# Altium PCB 20180623.PcbDoc (part 2 of 2)
Units mil, origin at the board's own origin, x right, y up, seen from the top; angles counter-clockwise.
Board outline 4375.58 x 1725.58 mil, 2 copper layers (Top Layer, Bottom Layer); 68 components, 90 nets, 323 pads, 77 vias.
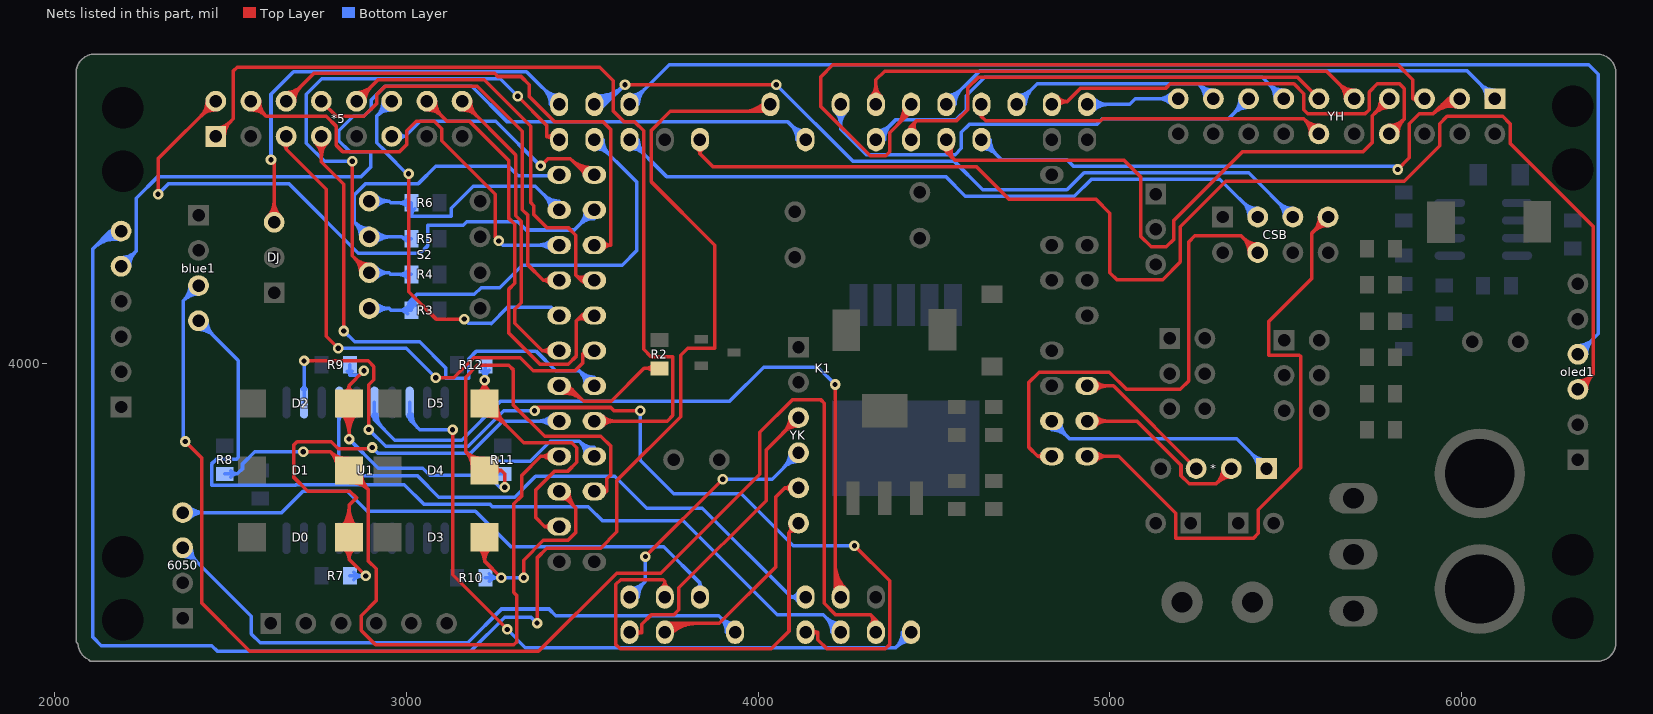
[diagram p2: the nets of this part, all layers, seen from the top]

## Via types
v1: diameter 30, hole 15, Top Layer to Bottom Layer, 77 vias

## Nets (pads, with @x,y where several pads share a name; then routed paths per layer and width w, separated by ;. In a path a pad name is that pad's centre, name@x,y a point inside that pad or via, vN(x,y) a via of type N, cw(c..) or ccw(c..) an arc to the next point about the centre after c; other vN are vias at no path point) (continued)
PTA25: K1.81 YH.10 | length 565.4
  Bottom Layer w10: K1.81@4935,4735 5056,4735 5072,4751 YH.10@5194,4751 ; K1.81@4945.61,4724.39 cw(c4971.21,4698.79) 4971.21,4735 cw(c4971.21,4771.21) K1.81@4945.61,4745.61 ; K1.81@4952.68,4717.32 cw(c4995.36,4674.64) 4995.36,4735 cw(c4995.36,4795.36) K1.81@4952.68,4752.68 ; YH.10@5176.66,4733.66 ccw(c5134.79,4691.79) 5134.79,4751 ccw(c5134.79,4810.21) YH.10@5176.66,4768.34 ; YH.10@5183.73,4740.73 ccw(c5158.93,4715.93) 5158.93,4751 ccw(c5158.93,4786.07) YH.10@5183.73,4761.27
PTA26: K1.85 YH.9 | length 900.7
  Bottom Layer w10: K1.85@4735,4735 4793.53,4793.53 5251.47,4793.53 YH.9@5294,4751 ; K1.85@4735,4750 ccw(c4735,4786.21) 4760.61,4760.61 ccw(c4786.21,4735) K1.85@4750,4735 ; K1.85@4735,4760 ccw(c4735,4820.36) 4777.68,4777.68 ccw(c4820.36,4735) K1.85@4760,4735 ; YH.9@5269.47,4751 ccw(c5210.26,4751) 5252.13,4792.87 ccw(c5294,4834.74) YH.9@5294,4775.53 ; YH.9@5279.47,4751 ccw(c5244.4,4751) 5269.2,4775.8 ccw(c5294,4800.6) YH.9@5294,4765.53
PTA27: K1.83 YH.17 | length 1521.5
  Top Layer w10: K1.83@4835,4735 4835,4743 4879,4743 ; K1.83@4850.75,4756.14 ccw(c4879,4779.94) 4879,4743 ; K1.83@4850.87,4729.76 cw(c4879,4706.51) 4879,4743 ; YH.17@5794,4651 5836.53,4693.53 5836.53,4780 5823,4793.53 5760,4793.53 5736.53,4770.06 5736.53,4720 5725,4708.47 5562.53,4708.47 5551,4720 5551,4765.53 5523,4793.53 5171.53,4793.53 5159.47,4781.47 4917.47,4781.47 4879,4743 ; YH.17@5794,4665.53 ccw(c5794,4700.6) 5818.8,4675.8 ccw(c5843.6,4651) YH.17@5808.53,4651 ; YH.17@5794,4675.53 ccw(c5794,4734.74) 5835.87,4692.87 ccw(c5877.74,4651) YH.17@5818.53,4651
PTA29: K1.87 YH.15 | length 1187
  Top Layer w10: K1.87@4629.46,4707.29 cw(c4627.43,4700) 4635,4700 ; K1.87@4635,4735 4635,4700 ; K1.87@4640.54,4707.29 ccw(c4642.57,4700) 4635,4700 ; YH.15@5569.47,4651 ccw(c5510.26,4651) 5552.13,4692.87 ccw(c5594,4734.74) YH.15@5594,4675.53 ; YH.15@5579.47,4651 ccw(c5544.4,4651) 5569.2,4675.8 ccw(c5594,4700.6) YH.15@5594,4665.53 ; YH.15@5594,4651 5551,4694 4980,4694 4974,4688 4647,4688 4635,4700
PTB0: K1.89 YH.1 | length 1930.9
  Bottom Layer w10: K1.89@4535,4735 4630,4830 6015,4830 YH.1@6094,4751 ; K1.89@4535,4750 ccw(c4535,4786.21) 4560.61,4760.61 ccw(c4586.21,4735) K1.89@4550,4735 ; K1.89@4535,4760 ccw(c4535,4820.36) 4577.68,4777.68 ccw(c4620.36,4735) K1.89@4560,4735 ; YH.1@6069.47,4751 ccw(c6010.26,4751) 6052.13,4792.87 ccw(c6094,4834.74) YH.1@6094,4775.53 ; YH.1@6079.47,4751 ccw(c6044.4,4751) 6069.2,4775.8 ccw(c6094,4800.6) YH.1@6094,4765.53
PTB1: K1.88 YH.2 | length 1950
  Top Layer w10: v1(5818,4550) 5851,4583 5851,4680 5879,4708 5918,4708 ; 5930.43,4720.43 cw(c5974.92,4675.95) YH.2@5990.42,4736.92 ; 5942.86,4732.86 cw(c5979.96,4695.77) YH.2@5992.88,4746.61 ; 5955.3,4745.3 cw(c5985,4715.59) YH.2@5995.35,4756.3 ; YH.2@5970.51,4743.93 ccw(c5961,4741.07) 5961,4751 ; YH.2@5970.51,4758.07 cw(c5961,4760.93) 5961,4751 ; YH.2@5987.96,4727.23 ccw(c5969.88,4656.12) 5918,4708 ; YH.2@5994,4751 5961,4751 ; 5918,4708 5961,4751
  Bottom Layer w10: K1.88@4635,4610 cw(c4635,4549.64) 4677.68,4592.32 cw(c4720.36,4635) K1.88@4660,4635 ; K1.88@4635,4620 cw(c4635,4583.79) 4660.61,4609.39 cw(c4686.21,4635) K1.88@4650,4635 ; K1.88@4635,4635 4692,4578 4878,4578 4897.47,4558.53 5809.47,4558.53 v1(5818,4550)
PTB2: K1.91 YH.3 | length 2451.7
  Top Layer w10: 4391.28,4671.28 ccw(c4335.42,4727.13) K1.91@4414.41,4727.13 ; 4408.35,4688.35 ccw(c4369.57,4727.13) K1.91@4424.41,4727.13 ; 4420.55,4700.55 cw(c4435,4686.1) K1.91@4435,4706.54 ; K1.91@4435,4735 4435,4715 4374,4654 4374,4600 4362.53,4588.53 4318.47,4588.53 4178,4729 4178,4813 4212.53,4847.53 5818.53,4847.53 5861,4805.06 5861,4751 ; YH.3@5870.51,4743.93 ccw(c5861,4741.07) 5861,4751 ; YH.3@5870.51,4758.07 cw(c5861,4760.93) 5861,4751 ; YH.3@5894,4751 5861,4751
PTB3: K1.90 YH.4 | length 2042.1
  Top Layer w10: K1.90@4529.46,4607.29 cw(c4527.43,4600) 4535,4600 ; K1.90@4535,4635 4535,4600 ; K1.90@4535.52,4626.84 ccw(c4559.15,4613.93) 4540.11,4594.89 ; K1.90@4540.54,4607.29 ccw(c4542.57,4600) 4535,4600 ; K1.90@4544.29,4622.05 ccw(c4571.37,4607.26) 4549.55,4585.45 ; K1.90@4553.07,4617.26 ccw(c4583.58,4600.59) 4559,4576 ; YH.4@5769.47,4751 cw(c5710.26,4751) 5752.13,4709.13 cw(c5794,4667.26) YH.4@5794,4726.47 ; YH.4@5779.47,4751 cw(c5744.4,4751) 5769.2,4726.2 cw(c5794,4701.4) YH.4@5794,4736.47 ; YH.4@5794,4751 5745.67,4702.67 5745.67,4626.67 5720,4601 5377,4601 5181,4405 5181,4351 5160,4330 5117,4330 5087,4360 5087,4529 5040,4576 4559,4576 ; 4535,4600 4559,4576
PTB4: K1.93 YH.5 | length 1697.6
  Top Layer w10: K1.93@4320.44,4757.43 ccw(c4285.29,4792.58) 4335,4792.58 ccw(c4384.71,4792.58) K1.93@4349.56,4757.43 ; K1.93@4335,4735 4335,4804.53 4360,4829.53 5615.47,4829.53 YH.5@5694,4751 ; YH.5@5669.47,4751 ccw(c5610.26,4751) 5652.13,4792.87 ccw(c5694,4834.74) YH.5@5694,4775.53 ; YH.5@5679.47,4751 ccw(c5644.4,4751) 5669.2,4775.8 ccw(c5694,4800.6) YH.5@5694,4765.53
PTB5: K1.92 YH.6 | length 1445.6
  Top Layer w10: K1.92@4427.52,4662.06 ccw(c4423.26,4673) 4435,4673 ; K1.92@4435,4635 4435,4673 ; K1.92@4435.42,4643.29 cw(c4450.94,4658.35) 4435.65,4673.65 ; K1.92@4442.48,4662.06 cw(c4446.74,4673) 4435,4673 ; K1.92@4442.6,4650.25 cw(c4458.22,4665.42) 4442.82,4680.82 ; K1.92@4449.77,4657.22 cw(c4465.51,4672.49) 4450,4688 ; YH.6@5594,4751 5533.47,4811.53 4625.53,4811.53 4596,4782 4596,4720 4564,4688 4450,4688 ; 4435,4673 4450,4688
PTB6: K1.94 YH.7 | length 1580.8
  Bottom Layer w10: K1.94@4335,4635 4392,4692 4564,4692 4592,4720 4592,4760 4644,4812 5433,4812 YH.7@5494,4751 ; K1.94@4335,4650 ccw(c4335,4686.21) 4360.61,4660.61 ccw(c4386.21,4635) K1.94@4350,4635 ; K1.94@4335,4660 ccw(c4335,4720.36) 4377.68,4677.68 ccw(c4420.36,4635) K1.94@4360,4635 ; YH.7@5469.47,4751 ccw(c5410.26,4751) 5452.13,4792.87 ccw(c5494,4834.74) YH.7@5494,4775.53 ; YH.7@5479.47,4751 ccw(c5444.4,4751) 5469.2,4775.8 ccw(c5494,4800.6) YH.7@5494,4765.53
PTB7: K1.95 YH.8 | length 1651.8
  Bottom Layer w10: K1.95@4217.32,4717.32 cw(c4174.64,4674.64) 4235,4674.64 cw(c4295.36,4674.64) K1.95@4252.68,4717.32 ; K1.95@4224.39,4724.39 cw(c4198.79,4698.79) 4235,4698.79 cw(c4271.21,4698.79) K1.95@4245.61,4724.39 ; K1.95@4235,4735 4235,4665 4308,4592 4560,4592 4578,4610 4578,4656 4600,4678 4962,4678 4978,4694 5337,4694 YH.8@5394,4751 ; YH.8@5369.47,4751 cw(c5310.26,4751) 5352.13,4709.13 cw(c5394,4667.26) YH.8@5394,4726.47 ; YH.8@5379.47,4751 cw(c5344.4,4751) 5369.2,4726.2 cw(c5394,4701.4) YH.8@5394,4736.47
PTB10_RX2: ?.6 K1.99 | length 5155.1
  Top Layer w10: v1(3372,3261) 3372,3446 3400,3474 3553,3474 3599,3520 3599,3666 3780,3847 3780,4022 3800,4042 3877,4042 3877,4335 3696,4516 3696,4660 3751,4715 4035,4715 K1.99@4035,4735 ; 3956.02,4715 ccw(c3956.02,4806.11) K1.99@4020.44,4741.69 ; 3980.16,4715 ccw(c3980.16,4781.97) K1.99@4027.51,4734.61 ; 4004.3,4715 ccw(c4004.3,4757.83) K1.99@4034.58,4727.54
  Bottom Layer w10: 2124.21,4339.21 cw(c2177.61,4285.82) ?.6@2188,4360.61 ; 2138.42,4353.42 cw(c2181.07,4310.77) ?.6@2189.38,4370.52 ; 2152.63,4367.63 cw(c2184.54,4335.72) ?.6@2190.75,4380.42 ; ?.6@2165.96,4370.13 ccw(c2160,4368.92) 2160,4375 ; ?.6@2165.96,4379.87 cw(c2160,4381.08) 2160,4375 ; ?.6@2186.62,4350.71 ccw(c2174.14,4260.86) 2110,4325 ; ?.6@2190,4375 2160,4375 ; v1(3372,3261) 3355,3278 3280,3278 3183.47,3181.47 2463.53,3181.47 2448,3197 2134,3197 2110,3221 2110,4325 ; 2110,4325 2160,4375
PTB11_TX2: ?.5 K1.98 | length 2845.9
  Bottom Layer w10: ?.5@2190,4275 2233,4318 2233,4468 2295,4530 2872.46,4530 2900,4557.54 2900,4599.54 2898.54,4601 2840,4601 2809,4632 2809,4660 2850,4701 2880,4701 2901.53,4722.53 2901.53,4748.53 2940,4787 3186,4787 3288,4685 4085,4685 K1.98@4135,4635 ; ?.5@2190,4289.53 ccw(c2190,4324.6) 2214.8,4299.8 ccw(c2239.6,4275) ?.5@2204.53,4275 ; ?.5@2190,4299.53 ccw(c2190,4358.74) 2231.87,4316.87 ccw(c2273.74,4275) ?.5@2214.53,4275 ; K1.98@4110,4635 ccw(c4049.64,4635) 4092.32,4677.68 ccw(c4135,4720.36) K1.98@4135,4660 ; K1.98@4120,4635 ccw(c4083.79,4635) 4109.39,4660.61 ccw(c4135,4686.21) K1.98@4135,4650
PTB21: K1.104 oled1.3 | length 3937.9
  Top Layer w10: K1.104@3826.4,4608.42 cw(c3820.24,4595) 3835,4595 ; K1.104@3835,4635 3835,4595 ; K1.104@3843.6,4608.42 ccw(c3849.76,4595) 3835,4595 ; oled1.3@6330,3925 6373,3968 6373,4389 6137,4625 6137,4680 6116,4701 5958,4701 5937,4680 5937,4617 5836.18,4516.18 5329.31,4516.18 5200.13,4387 5200.13,4287.13 5150,4237 5020,4237 5000,4257 5000,4426 4960,4466 4713,4466 4621,4558 3872,4558 3835,4595 ; oled1.3@6330,3939.53 ccw(c6330,3974.6) 6354.8,3949.8 ccw(c6379.6,3925) oled1.3@6344.53,3925 ; oled1.3@6330,3949.53 ccw(c6330,4008.74) 6371.87,3966.87 ccw(c6413.74,3925) oled1.3@6354.53,3925
PTB22: K1.107 oled1.4 | length 3930.8
  Bottom Layer w10: K1.107@3635,4735 3748,4848 6361,4848 6388,4821 6388,4083 oled1.4@6330,4025 ; K1.107@3635,4750 ccw(c3635,4786.21) 3660.61,4760.61 ccw(c3686.21,4735) K1.107@3650,4735 ; K1.107@3635,4760 ccw(c3635,4820.36) 3677.68,4777.68 ccw(c3720.36,4735) K1.107@3660,4735 ; oled1.4@6330,4039.53 ccw(c6330,4074.6) 6354.8,4049.8 ccw(c6379.6,4025) oled1.4@6344.53,4025 ; oled1.4@6330,4049.53 ccw(c6330,4108.74) 6371.87,4066.87 ccw(c6413.74,4025) oled1.4@6354.53,4025
PTC0: CSB.2 K1.108 | length 2216.1
  Bottom Layer w10: K1.108@3635,4610 cw(c3635,4549.64) 3677.68,4592.32 cw(c3720.36,4635) K1.108@3660,4635 ; K1.108@3635,4620 cw(c3635,4583.79) 3660.61,4609.39 cw(c3686.21,4635) K1.108@3650,4635 ; K1.108@3635,4635 3740,4530 4533,4530 4589,4474 4898.94,4474 4947.47,4522.53 5312.47,4522.53 CSB.2@5420,4415 ; CSB.2@5395.47,4415 ccw(c5336.26,4415) 5378.13,4456.87 ccw(c5420,4498.74) CSB.2@5420,4439.53 ; CSB.2@5405.47,4415 ccw(c5370.4,4415) 5395.2,4439.8 ccw(c5420,4464.6) CSB.2@5420,4429.53
PTC1: CSB.3 K1.109 | length 2648.8
  Top Layer w10: v1(3622,4791) v1(4052,4791)
  Bottom Layer w10: K1.109@3534.58,4730.02 ccw(c3538.98,4782.58) 3576.28,4745.28 ; K1.109@3535,4735 3566,4735 ; K1.109@3535.42,4739.98 ccw(c3541.34,4810.7) 3591.52,4760.52 ; K1.109@3536.25,4749.95 ccw(c3543.69,4838.82) 3606.76,4775.76 ; K1.109@3537.09,4759.91 ccw(c3546.05,4866.94) v1(3622,4791) 3566,4735 ; K1.109@3559.43,4729.7 cw(c3566,4728.28) 3566,4735 ; K1.109@3559.43,4740.3 ccw(c3566,4741.72) 3566,4735 ; v1(4052,4791) 4269,4574 4557,4574 4639,4492 4878,4492 4926.53,4540.53 5394.47,4540.53 CSB.3@5520,4415 ; CSB.3@5495.47,4415 ccw(c5436.26,4415) 5478.13,4456.87 ccw(c5520,4498.74) CSB.3@5520,4439.53 ; CSB.3@5505.47,4415 ccw(c5470.4,4415) 5495.2,4439.8 ccw(c5520,4464.6) CSB.3@5520,4429.53
PTC2: DJ.3 K1.111 | length 1551.6
  Top Layer w10: DJ.3@2607.66,4417.34 ccw(c2565.79,4459.21) 2625,4459.21 ccw(c2684.21,4459.21) DJ.3@2642.34,4417.34 ; DJ.3@2614.73,4410.27 ccw(c2589.93,4435.07) 2625,4435.07 ccw(c2660.07,4435.07) DJ.3@2635.27,4410.27 ; v1(2616,4578) 2625,4569 DJ.3@2625,4400
  Bottom Layer w10: v1(2616,4578) 2616,4764 2680,4828 3342,4828 K1.111@3435,4735 ; K1.111@3410,4735 ccw(c3349.64,4735) 3392.32,4777.68 ccw(c3435,4820.36) K1.111@3435,4760 ; K1.111@3420,4735 ccw(c3383.79,4735) 3409.39,4760.61 ccw(c3435,4786.21) K1.111@3435,4750
PTC3: K1.110 R3.1 S2.8 | length 1687.2
  Bottom Layer w10: S2.8@2895,4155 2952,4155 ; S2.8@2905.55,4145.01 cw(c2928.76,4123.04) 2928.76,4155 cw(c2928.76,4186.96) S2.8@2905.55,4164.99 ; S2.8@2912.81,4138.14 cw(c2952,4101.04) 2952,4155 ; S2.8@2912.81,4171.86 ccw(c2952,4208.96) 2952,4155 ; R3.1@3004.39,4139.39 ccw(c2978.79,4113.79) 2978.79,4150 ccw(c2978.79,4186.21) R3.1@3004.39,4160.61 ; R3.1@3007.94,4168.24 ccw(c3001.67,4180) 3015,4180 ; R3.1@3010.91,4152.13 cw(c3027.53,4163.8) 3013.17,4178.17 ; R3.1@3019.09,4157.87 cw(c3037.42,4170.75) 3021.58,4186.58 ; R3.1@3022.06,4168.24 cw(c3028.33,4180) 3015,4180 ; R3.1@3027.28,4163.62 cw(c3047.31,4177.69) 3030,4195 ; K1.110@3535,4610 cw(c3535,4549.64) 3577.68,4592.32 cw(c3620.36,4635) K1.110@3560,4635 ; K1.110@3535,4620 cw(c3535,4583.79) 3560.61,4609.39 cw(c3586.21,4635) K1.110@3550,4635 ; K1.110@3535,4635 3656,4514 3656,4320 3614,4278 3330,4278 3266,4214 3213,4214 3194,4195 3030,4195 ; 2952,4155 2957,4150 R3.1@3015,4150 3015,4180 ; 3015,4180 3030,4195
PTC4: K1.112 R4.1 S2.7 | length 1968.2
  Top Layer w10: v1(2847,4573) 2847,4304.67 S2.7@2895,4256.67 ; S2.7@2870.47,4256.67 ccw(c2811.26,4256.67) 2853.13,4298.54 ccw(c2895,4340.41) S2.7@2895,4281.19 ; S2.7@2880.47,4256.67 ccw(c2845.4,4256.67) 2870.2,4281.47 ccw(c2895,4306.27) S2.7@2895,4271.19 ; v1(3317,4758) 3400,4675 3400,4643 ; K1.112@3416.95,4632.97 ccw(c3400,4623.67) 3400,4643 ; K1.112@3417.06,4652.97 cw(c3400,4662.57) 3400,4643 ; K1.112@3435,4635 3435,4643 3400,4643
  Bottom Layer w10: v1(2847,4573) 2768,4573 2716,4625 2716,4764 2760,4808 3267,4808 v1(3317,4758) ; S2.7@2895,4256.67 2952,4256.67 ; S2.7@2905.55,4246.68 cw(c2928.76,4224.7) 2928.76,4256.67 cw(c2928.76,4288.63) S2.7@2905.55,4266.65 ; S2.7@2912.81,4239.8 cw(c2952,4202.7) 2952,4256.67 ; S2.7@2912.81,4273.53 ccw(c2952,4310.63) 2952,4256.67 ; R4.1@3004.39,4241.06 ccw(c2978.79,4215.45) 2978.79,4251.67 ccw(c2978.79,4287.88) R4.1@3004.39,4262.27 ; R4.1@3015,4251.67 2957,4251.67 2952,4256.67
PTC5: K1.1 R5.1 S2.6 | length 1206.1
  Bottom Layer w10: S2.6@2870.47,4358.33 ccw(c2811.26,4358.33) 2853.13,4400.21 ccw(c2895,4442.08) S2.6@2895,4382.86 ; S2.6@2880.47,4358.33 ccw(c2845.4,4358.33) 2870.2,4383.13 ccw(c2895,4407.93) S2.6@2895,4372.86 ; S2.6@2905.27,4348.06 cw(c2930.07,4323.26) 2930.07,4358.33 cw(c2930.07,4393.41) S2.6@2905.27,4368.61 ; S2.6@2912.34,4340.99 cw(c2954.21,4299.12) 2954.21,4358.33 cw(c2954.21,4417.55) S2.6@2912.34,4375.68 ; R5.1@3000.99,4347.98 ccw(c2993.2,4345) 2993.2,4353.33 ; R5.1@3000.99,4358.69 cw(c2993.2,4361.67) 2993.2,4353.33 ; R5.1@3015,4353.33 2993.2,4353.33 ; K1.1@3435,4535 3406,4535 3406,4532 3318,4532 3291,4559 3084,4559 3035,4510 2884.86,4510 2852,4477.14 2852,4401.33 S2.6@2895,4358.33 2988.2,4358.33 2993.2,4353.33
PTC6: *5.6 K1.2 | length 870.2
  Top Layer w10: v1(3382,4560) 3403,4581 3466,4581 3512,4535 K1.2@3535,4535 ; 3466.15,4580.85 ccw(c3527.13,4641.82) K1.2@3527.13,4555.59 ; 3483.23,4563.77 ccw(c3527.13,4607.68) K1.2@3527.13,4545.59 ; 3500.3,4546.7 ccw(c3527.13,4573.53) K1.2@3527.13,4535.59 ; 3502.67,4544.33 cw(c3493.34,4535) K1.2@3506.54,4535
  Bottom Layer w10: *5.6@2959,4644 2997,4644 ; *5.6@2981.35,4633.9 cw(c2997,4626.83) 2997,4644 ; *5.6@2981.35,4654.1 ccw(c2997,4661.17) 2997,4644 ; v1(3382,4560) 3255,4687 3040,4687 2997,4644
PTC7: K1.3 R6.2 S2.5 | length 1054.5
  Bottom Layer w10: S2.5@2895,4460 2952,4460 ; S2.5@2905.55,4450.01 cw(c2928.76,4428.04) 2928.76,4460 cw(c2928.76,4491.96) S2.5@2905.55,4469.99 ; S2.5@2912.81,4443.14 cw(c2952,4406.04) 2952,4460 ; S2.5@2912.81,4476.86 ccw(c2952,4513.96) 2952,4460 ; R6.2@3004.39,4444.39 ccw(c2978.79,4418.79) 2978.79,4455 ccw(c2978.79,4491.21) R6.2@3004.39,4465.61 ; R6.2@3005.14,4438.7 cw(c2986.2,4417) 3015,4417 ; R6.2@3024.86,4438.7 ccw(c3043.8,4417) 3015,4417 ; K1.3@3410,4435 ccw(c3349.64,4435) 3392.32,4477.68 ccw(c3435,4520.36) K1.3@3435,4460 ; K1.3@3420,4435 ccw(c3383.79,4435) 3409.39,4460.61 ccw(c3435,4486.21) K1.3@3435,4450 ; K1.3@3435,4435 3367.2,4502.8 3190.8,4502.8 3128,4440 3128,4417 3015,4417 ; 2952,4460 2957,4455 R6.2@3015,4455 3015,4417
PTC8: *5.16 K1.4 | length 2069.8
  Top Layer w10: v1(2295,4480) 2295,4580 *5.16@2459,4744 ; *5.16@2434.47,4744 cw(c2375.26,4744) 2417.13,4702.13 cw(c2459,4660.26) *5.16@2459,4719.47 ; *5.16@2444.47,4744 cw(c2409.4,4744) 2434.2,4719.2 cw(c2459,4694.4) *5.16@2459,4729.47
  Bottom Layer w10: v1(2295,4480) 2325,4510 2666,4510 2864,4312 3040,4312 3062,4334 3062,4391.33 3162.67,4391.33 3172.33,4401 3318,4401 3341,4378 3478,4378 K1.4@3535,4435 ; K1.4@3510,4435 cw(c3449.64,4435) 3492.32,4392.32 cw(c3535,4349.64) K1.4@3535,4410 ; K1.4@3520,4435 cw(c3483.79,4435) 3509.39,4409.39 cw(c3535,4383.79) K1.4@3535,4420
PTC9: *5.15 K1.5 | length 1562.8
  Top Layer w10: *5.15@2559,4719.47 cw(c2559,4660.26) 2600.87,4702.13 cw(c2642.74,4744) *5.15@2583.53,4744 ; *5.15@2559,4729.47 cw(c2559,4694.4) 2583.8,4719.2 cw(c2608.6,4744) *5.15@2573.53,4744 ; *5.15@2559,4744 2602,4701 2773,4701 2802,4672 2802,4618.2 2819.2,4601 2982,4601 3002,4621 3002,4660 3029,4687 3080,4687 3101.53,4665.47 3101.53,4631.47 3253,4480 3253,4357 v1(3263,4347)
  Bottom Layer w10: v1(3263,4347) 3275,4335 K1.5@3435,4335 ; K1.5@3417.32,4317.32 ccw(c3374.64,4274.64) 3374.64,4335 ccw(c3374.64,4395.36) K1.5@3417.32,4352.68 ; K1.5@3424.39,4324.39 ccw(c3398.79,4298.79) 3398.79,4335 ccw(c3398.79,4371.21) K1.5@3424.39,4345.61
PTC10: *5.14 K1.6 | length 1613.8
  Top Layer w10: *5.14@2659,4744 2738,4823 3252,4823 3260.77,4814.23 3326.49,4814.23 3349.7,4791.02 3349.7,4757.3 3422,4685 3560,4685 3582,4663 3582,4336 3581,4335 ; *5.14@2659,4758.53 ccw(c2659,4793.6) 2683.8,4768.8 ccw(c2708.6,4744) *5.14@2673.53,4744 ; *5.14@2659,4768.53 ccw(c2659,4827.74) 2700.87,4785.87 ccw(c2742.74,4744) *5.14@2683.53,4744 ; K1.6@3535,4335 3581,4335 ; K1.6@3560.09,4323.71 cw(c3581,4310) 3581,4335 ; K1.6@3560.09,4346.29 ccw(c3581,4360) 3581,4335
PTC11: *5.13 K1.7 | length 1232.5
  Top Layer w10: *5.13@2759,4744 2802,4701 2880,4701 2916.47,4737.47 2916.47,4763 2940,4786.53 3202,4786.53 3330,4658.53 3330,4436 3345,4421 3345,4280 3390,4235 ; K1.7@3409.66,4224.1 ccw(c3390,4211.83) 3390,4235 ; K1.7@3409.66,4245.9 cw(c3390,4258.17) 3390,4235 ; K1.7@3435,4235 3390,4235
PTC12: *5.12 K1.8 | length 1423.4
  Top Layer w10: *5.12@2859,4744 2920,4805 3222.23,4805 3354,4673.23 3354,4456 3363,4447 3363,4422 3400,4385 3460,4385 3482,4363 3482,4250 ; *5.12@2859,4758.53 ccw(c2859,4793.6) 2883.8,4768.8 ccw(c2908.6,4744) *5.12@2873.53,4744 ; *5.12@2859,4768.53 ccw(c2859,4827.74) 2900.87,4785.87 ccw(c2942.74,4744) *5.12@2883.53,4744 ; 3489.18,4242.82 ccw(c3504.58,4258.22) K1.8@3519.75,4242.6 ; 3496.35,4235.65 ccw(c3511.65,4250.94) K1.8@3526.71,4235.42 ; K1.8@3507.94,4227.52 ccw(c3497,4223.26) 3497,4235 ; K1.8@3507.94,4242.48 cw(c3497,4246.74) 3497,4235 ; K1.8@3512.78,4249.77 cw(c3497.51,4265.51) 3482,4250 ; K1.8@3535,4235 3497,4235 ; 3482,4250 3497,4235
PTC13: *5.11 K1.9 | length 1241.8
  Top Layer w10: v1(3007,4538) 3007,4203 3085,4125 v1(3165,4125)
  Bottom Layer w10: *5.11@2934.47,4744 cw(c2875.26,4744) 2917.13,4702.13 cw(c2959,4660.26) *5.11@2959,4719.47 ; *5.11@2944.47,4744 cw(c2909.4,4744) 2934.2,4719.2 cw(c2959,4694.4) *5.11@2959,4729.47 ; *5.11@2959,4744 2916,4701 2916,4639 2916.47,4638.53 2916.47,4626.38 2941.38,4601.47 2941.38,4598.62 3002,4538 v1(3007,4538) ; v1(3165,4125) 3177.53,4112.47 3241.53,4112.47 3242,4112 3288,4158 3412,4158 K1.9@3435,4135
PTC14: *5.10 K1.10 | length 1469.4
  Top Layer w10: *5.10@3059,4719.47 cw(c3059,4660.26) 3100.87,4702.13 cw(c3142.74,4744) *5.10@3083.53,4744 ; *5.10@3059,4729.47 cw(c3059,4694.4) 3083.8,4719.2 cw(c3108.6,4744) *5.10@3073.53,4744 ; *5.10@3059,4744 3116,4687 3180,4687 3291,4576 3291,4412 3309,4394 3309,4226.84 3291,4208.84 3291,4085.75 3380.34,3996.41 3460.41,3996.41 3484,4020 3484,4120 ; 3491.18,4127.18 cw(c3505.58,4112.78) K1.10@3519.75,4127.4 ; 3498.36,4134.36 cw(c3512.65,4120.07) K1.10@3526.71,4134.58 ; K1.10@3507.5,4128.78 ccw(c3499,4126.09) 3499,4135 ; K1.10@3507.5,4141.22 cw(c3499,4143.91) 3499,4135 ; K1.10@3512.79,4120.22 ccw(c3498.51,4105.49) 3484,4120 ; K1.10@3535,4135 3499,4135 ; 3484,4120 3499,4135
PTC15: *5.9 K1.11 | length 1069.1
  Top Layer w10: *5.9@3159,4719.47 cw(c3159,4660.26) 3200.87,4702.13 cw(c3242.74,4744) *5.9@3183.53,4744 ; *5.9@3159,4729.47 cw(c3159,4694.4) 3183.8,4719.2 cw(c3208.6,4744) *5.9@3173.53,4744 ; *5.9@3159,4744 3312,4591 3312,4418 3327,4403 3327,4171 3309,4153 3309,4113 3387,4035 ; K1.11@3410.4,4022.99 ccw(c3387,4006.2) 3387,4035 ; K1.11@3410.4,4047.01 cw(c3387,4063.8) 3387,4035 ; K1.11@3435,4035 3387,4035
PTC16: *5.3 K1.12 | length 1536
  Top Layer w10: *5.3@2650.03,4621.17 cw(c2644.85,4608) 2659,4608 ; *5.3@2659,4644 2659,4608 ; *5.3@2667.97,4621.17 ccw(c2673.15,4608) 2659,4608 ; v1(2807,4042) 2773,4076 2773,4494 2659,4608 ; v1(3084,3958) 3135,3958 3192,4015 3324,4015 3361,3978 3480,3978 3502,4000 3502,4027 K1.12@3535,4035
  Bottom Layer w10: v1(2807,4042) 3000,4042 v1(3084,3958)
PTC17: *5.4 K1.14 | length 1769.4
  Top Layer w10: *5.4@2741.66,4626.66 cw(c2699.79,4584.79) 2759,4584.79 cw(c2818.21,4584.79) *5.4@2776.34,4626.66 ; *5.4@2748.73,4633.73 cw(c2723.93,4608.93) 2759,4608.93 cw(c2794.07,4608.93) *5.4@2769.27,4633.73 ; *5.4@2759,4644 2759,4572 2823,4508 v1(2823,4091)
  Bottom Layer w10: v1(2823,4091) 2854,4060 3038.87,4060 3112,3986.87 3112,3957 3178,3957 3178,4012 3200,4034 3369,4034 3425,3978 3492,3978 K1.14@3535,3935 ; K1.14@3510,3935 ccw(c3449.64,3935) 3492.32,3977.68 ccw(c3535,4020.36) K1.14@3535,3960 ; K1.14@3520,3935 ccw(c3483.79,3935) 3509.39,3960.61 ccw(c3535,3986.21) K1.14@3535,3950
PTC18: *5.1 K1.16 | length 2838.1
  Top Layer w10: *5.1@2459,4644 2509,4694 2509,4830 2520,4841 3550,4841 3589,4802 3589,4716 3620,4685 3650,4685 3675,4660 3675,4039 3696,4018 3758,4018 3758,3851 3742,3835 K1.16@3535,3835 ; *5.1@2459,4658.53 ccw(c2459,4693.6) 2483.8,4668.8 ccw(c2508.6,4644) *5.1@2473.53,4644 ; *5.1@2459,4668.53 ccw(c2459,4727.74) 2500.87,4685.87 ccw(c2542.74,4644) *5.1@2483.53,4644 ; K1.16@3557.43,3820.44 cw(c3592.58,3785.29) 3592.58,3835 cw(c3592.58,3884.71) K1.16@3557.43,3849.56
PTC19: K1.13 R2.1@3720,3985 | length 547.9
  Top Layer w10: K1.13@3435,3935 3461,3935 3504.41,3891.59 ; K1.13@3442.91,3934.41 cw(c3445.29,3895.3) 3472.99,3923.01 ; K1.13@3443.52,3924.43 cw(c3447.09,3865.69) 3488.7,3907.3 ; K1.13@3444.12,3914.45 cw(c3448.88,3836.07) 3504.41,3891.59 ; R2.1@3704.39,3974.39 ccw(c3678.79,3948.79) 3678.79,3985 ccw(c3678.79,4021.21) R2.1@3704.39,3995.61 ; R2.1@3720,3985 3676,3985 3582.59,3891.59 3504.41,3891.59
PTD0: D0.2 K1.15 R7.1 | length 1974.5
  Top Layer w10: D0.2@2813.05,3529.75 ccw(c2753.3,3589.5) 2837.8,3589.5 ccw(c2922.29,3589.5) D0.2@2862.54,3529.75 ; D0.2@2819.39,3475.23 cw(c2798.97,3442.21) 2837.8,3442.21 ; D0.2@2820.12,3522.68 ccw(c2777.44,3565.36) 2837.8,3565.36 ccw(c2898.15,3565.36) D0.2@2855.47,3522.68 ; D0.2@2824.65,3483.74 cw(c2810.06,3460.15) 2837.8,3460.15 cw(c2865.53,3460.15) D0.2@2850.94,3483.74 ; D0.2@2856.2,3475.23 ccw(c2876.63,3442.21) 2837.8,3442.21 ; v1(2885,3395) 2837.8,3442.2 ; v1(2904,3760) 2900,3756 2807,3756 2787,3776 2690,3776 2680,3766 2680,3676 2720,3636 2840,3636 2859,3617 2837.8,3595.8 D0.2@2837.8,3505 2837.8,3442.2
  Bottom Layer w10: R7.1@2840,3395 v1(2885,3395) ; R7.1@2850.61,3384.39 cw(c2876.21,3358.79) 2876.21,3395 cw(c2876.21,3431.21) R7.1@2850.61,3405.61 ; v1(2904,3760) 2921,3743 3182,3743 3274,3835 K1.15@3435,3835 ; K1.15@3417.32,3817.32 ccw(c3374.64,3774.64) 3374.64,3835 ccw(c3374.64,3895.36) K1.15@3417.32,3852.68 ; K1.15@3424.39,3824.39 ccw(c3398.79,3798.79) 3398.79,3835 ccw(c3398.79,3871.21) K1.15@3424.39,3845.61
PTD1: D1.2@2837.8,3695 K1.17 R8.1 | length 2486.9
  Top Layer w10: v1(2708,3748) 2784.8,3748 ; D1.2@2802.93,3698.09 ccw(c2740.43,3703.63) 2784.8,3748 ; D1.2@2812.89,3697.21 ccw(c2768.25,3701.16) 2799.94,3732.86 ccw(c2831.63,3764.55) D1.2@2835.59,3719.9 ; D1.2@2834.71,3729.86 cw(c2829.17,3792.37) 2784.8,3748 ; D1.2@2839.23,3670.04 cw(c2842.09,3620.44) 2877.23,3655.57 cw(c2912.36,3690.7) D1.2@2862.75,3693.56 ; D1.2@2839.81,3660.06 cw(c2843.81,3590.61) 2893,3639.8 ; D1.2@2872.74,3692.99 ccw(c2942.18,3688.99) 2893,3639.8 ; K1.17@3411.35,3721.77 ccw(c3383,3698.02) 3383,3735 ; K1.17@3411.35,3748.23 cw(c3383,3771.98) 3383,3735 ; K1.17@3435,3735 3383,3735 ; 2784.8,3748 D1.2@2837.8,3695 2893,3639.8 ; 2893,3639.8 2893,3437 2915,3415 2915,3325 2872,3282 2872,3240 2913,3199 3306,3199 3315,3208 3315,3339 3306,3348 3306,3600 3328,3622 3328,3680 3383,3735
  Bottom Layer w10: R8.1@2485,3685 2520,3685 ; R8.1@2502,3676 cw(c2520,3662.5) 2520,3685 ; R8.1@2502,3694 ccw(c2520,3707.5) 2520,3685 ; v1(2708,3748) 2570,3748 2535,3713 2535,3700 2520,3685
PTD2: D2.2 K1.18 R9.1 | length 1566.8
  Top Layer w10: D2.2@2813.05,3860.25 cw(c2753.3,3800.5) 2837.8,3800.5 cw(c2922.29,3800.5) D2.2@2862.54,3860.25 ; D2.2@2820.12,3867.32 cw(c2777.44,3824.64) 2837.8,3824.64 cw(c2898.15,3824.64) D2.2@2855.47,3867.32 ; D2.2@2825.33,3917.71 ccw(c2818.44,3935.79) 2837.8,3935.79 ; v1(2837.8,3784) D2.2@2837.8,3885 2837.8,3935.8 ; D2.2@2850.26,3917.71 cw(c2857.15,3935.79) 2837.8,3935.79 ; v1(2880,3978) 2837.8,3935.8
  Bottom Layer w10: v1(2837.8,3784) 2920.8,3701 3047,3701 3067,3681 3188,3681 3227.78,3720.78 3352.78,3720.78 3410,3778 3492,3778 K1.18@3535,3735 ; R9.1@2840,3995 2840,3965.22 ; v1(2880,3978) 2867.22,3965.22 2840,3965.22 ; K1.18@3510,3735 ccw(c3449.64,3735) 3492.32,3777.68 ccw(c3535,3820.36) K1.18@3535,3760 ; K1.18@3520,3735 ccw(c3483.79,3735) 3509.39,3760.61 ccw(c3535,3786.21) K1.18@3535,3750 ; 2840,3965.22 cw(c2852.97,3965.22) 2846.95,3976.71 ccw(c2852.97,3965.22) 2840,3965.22 ; 2840,3965.22 ccw(c2827.03,3965.22) 2833.05,3976.71 cw(c2827.03,3965.22) 2840,3965.22
PTD3: D3.2@3222.8,3505 K1.19 R10.1 | length 931.8
  Top Layer w10: D3.2@3202.53,3476.47 cw(c3174.64,3437.21) 3222.8,3437.21 ; D3.2@3208.32,3484.62 cw(c3188.4,3456.58) 3222.8,3456.58 cw(c3257.19,3456.58) D3.2@3237.27,3484.62 ; D3.2@3222.8,3505 3222.8,3437.2 ; D3.2@3243.06,3476.47 ccw(c3270.95,3437.21) 3222.8,3437.21 ; v1(3270,3390) 3222.8,3437.2 ; v1(3334,3390) 3334,3440 3390,3496 3460,3496 3481.47,3517.47 3481.47,3588.53 ; K1.19@3435,3635 3481.47,3588.53 ; K1.19@3442.87,3614.41 cw(c3442.87,3583.71) 3464.58,3605.42 ; K1.19@3453.46,3634.63 ccw(c3493.63,3633.22) 3465.21,3604.79 ; K1.19@3463.45,3634.28 ccw(c3525.04,3632.11) 3481.46,3588.54
  Bottom Layer w10: R10.1@3225,3390 v1(3270,3390) v1(3334,3390) ; R10.1@3235.61,3379.39 cw(c3261.21,3353.79) 3261.21,3390 cw(c3261.21,3426.21) R10.1@3235.61,3400.61
PTD4: D4.2 K1.20 R11.1 | length 1463.9
  Top Layer w10: D4.2@3187.9,3697.69 ccw(c3122.92,3702.71) 3169,3748.79 ; D4.2@3197.87,3696.92 ccw(c3151.45,3700.5) 3184.37,3733.42 ccw(c3217.29,3766.34) D4.2@3220.87,3719.93 ; D4.2@3220.1,3729.9 cw(c3215.09,3794.88) 3169,3748.79 ; D4.2@3256.29,3684.83 cw(c3270,3680.67) 3270,3695 ; D4.2@3256.29,3705.17 ccw(c3270,3709.33) 3270,3695 ; v1(3280,3647) 3280,3685 3270,3695 ; K1.20@3535,3635 3570,3635 ; K1.20@3562.71,3629.46 cw(c3570,3627.43) 3570,3635 ; K1.20@3562.71,3640.54 ccw(c3570,3642.57) 3570,3635 ; 3169,3748.8 3169,3960 3202.5,3993.5 3291.5,3993.5 3305,3980 3305,3880 3393.41,3791.59 3553.41,3791.59 3582,3763 3582,3682.8 3570,3670.8 3570,3635 ; 3169,3748.8 D4.2@3222.8,3695 3270,3695
  Bottom Layer w10: R11.1@3275,3685 3253,3685 3253,3660 3266,3647 v1(3280,3647)
PTD5: D5.2@3222.8,3885 K1.21 R12.1 | length 1241.3
  Top Layer w10: D5.2@3203.16,3913.97 ccw(c3178.07,3951) v1(3222.8,3951) ; D5.2@3208.77,3905.7 ccw(c3190.85,3932.14) 3222.8,3932.14 ccw(c3254.74,3932.14) D5.2@3236.82,3905.7 ; D5.2@3222.8,3850 cw(c3222.8,3765.5) 3282.54,3825.25 cw(c3342.29,3885) D5.2@3257.8,3885 ; D5.2@3222.8,3860 cw(c3222.8,3799.64) 3265.47,3842.32 cw(c3308.15,3885) D5.2@3247.8,3885 ; D5.2@3242.43,3913.97 cw(c3267.52,3951) v1(3222.8,3951) ; K1.21@3408.66,3525.89 ccw(c3394,3518.65) 3394,3535 ; K1.21@3408.66,3544.11 cw(c3394,3551.35) 3394,3535 ; K1.21@3435,3535 3394,3535 ; v1(3222.8,3951) D5.2@3222.8,3885 3334.2,3773.59 3470.41,3773.59 3485,3759 3485,3718 3460,3693 3422,3693 3369,3640 3369,3560 3394,3535
  Bottom Layer w10: R12.1@3214.39,3979.39 cw(c3188.79,3953.79) 3225,3953.79 cw(c3261.21,3953.79) R12.1@3235.61,3979.39 ; v1(3222.8,3951) 3225,3953.2 R12.1@3225,3995
PTD11: K1.29 YK.3 | length 1058.3
  Top Layer w10: K1.29@3635,3234.99 3635,3234 3670,3234 ; K1.29@3652.55,3224.23 cw(c3670,3213.54) 3670,3234 ; K1.29@3653.39,3244.24 ccw(c3670,3252.59) 3670,3234 ; YK.3@4090.47,3845 cw(c4031.26,3845) 4073.13,3803.13 cw(c4115,3761.26) YK.3@4115,3820.47 ; YK.3@4100.47,3845 cw(c4065.4,3845) 4090.2,3820.2 cw(c4115,3795.4) YK.3@4115,3830.47 ; YK.3@4115,3845 4023,3753 4023,3609 3775,3361 3775,3299 3760,3284 3696,3284 3670,3258 3670,3234
PTD12: K1.30 YK.4 | length 990.6
  Top Layer w10: v1(3680,3450) v1(3900,3670)
  Bottom Layer w10: K1.30@3635,3334.99 3680,3379.99 v1(3680,3450) ; K1.30@3635,3349.99 ccw(c3635,3386.2) 3660.6,3360.59 ccw(c3686.21,3334.99) K1.30@3650,3334.99 ; K1.30@3635,3359.99 ccw(c3635,3420.34) 3677.67,3377.66 ccw(c3720.35,3334.99) K1.30@3660,3334.99 ; v1(3900,3670) 4040,3670 YK.4@4115,3745 ; YK.4@4090.47,3745 cw(c4031.26,3745) 4073.13,3703.13 cw(c4115,3661.26) YK.4@4115,3720.47 ; YK.4@4100.47,3745 cw(c4065.4,3745) 4090.2,3720.2 cw(c4115,3695.4) YK.4@4115,3730.47
PTD13: K1.31 YK.5 | length 922.1
  Top Layer w10: K1.31@3735,3234.99 3735,3260.1 3890.1,3260.1 4051,3421 4051,3620 4076,3645 ; K1.31@3735.41,3242.44 cw(c3778.03,3199.82) 3778.03,3260.1 ; K1.31@3742.48,3235.37 cw(c3802.18,3175.68) 3802.18,3260.1 ; K1.31@3749.56,3228.3 cw(c3826.32,3151.54) 3826.32,3260.1 ; YK.5@4092.89,3634.38 ccw(c4076,3626.26) 4076,3645 ; YK.5@4092.89,3655.62 cw(c4076,3663.74) 4076,3645 ; YK.5@4115,3645 4076,3645
PTD14: K1.32 YK.6 | length 1285.1
  Top Layer w10: K1.32@3724.09,3360.32 ccw(c3711.79,3380) 3735,3380 ; K1.32@3735,3334.99 3735,3380 ; K1.32@3745.91,3360.32 cw(c3758.2,3380) 3735,3380 ; YK.6@4092.02,3536.44 cw(c4075.66,3530.34) 4088,3518 ; YK.6@4106.44,3522.02 ccw(c4100.34,3505.66) 4088,3518 ; YK.6@4115,3545 4088,3518 ; 3735,3380 3730.63,3384.37 3609.37,3384.37 3596,3371 3596,3200 3608,3188 4038,3188 4088,3238 4088,3518
PTE0: 6050.4 K1.34 | length 1835.1
  Bottom Layer w10: 6050.4@2365,3575 2646,3575 2707,3636 2832.61,3636 2889.61,3579 3197,3579 3298,3478 3732,3478 3835,3375 ; 6050.4@2375.27,3564.73 cw(c2400.07,3539.93) 2400.07,3575 cw(c2400.07,3610.07) 6050.4@2375.27,3585.27 ; 6050.4@2382.34,3557.66 cw(c2424.21,3515.79) 2424.21,3575 cw(c2424.21,3634.21) 6050.4@2382.34,3592.34 ; K1.34@3824.04,3357.45 ccw(c3815.47,3375) 3835,3375 ; K1.34@3835,3334.99 3835,3375 ; K1.34@3845.96,3357.45 cw(c3854.52,3375) 3835,3375
PTE1: 6050.3 K1.35 | length 2078
  Bottom Layer w10: 6050.3@2365,3450.47 cw(c2365,3391.26) 2406.87,3433.13 cw(c2448.74,3475) 6050.3@2389.53,3475 ; 6050.3@2365,3460.47 cw(c2365,3425.4) 2389.8,3450.2 cw(c2414.6,3475) 6050.3@2379.53,3475 ; 6050.3@2365,3475 2560,3280 2560,3230 2585,3205 3175,3205 3271,3301 3406,3301 3425,3282 3887.98,3282 K1.35@3935,3234.99 ; K1.35@3910,3234.99 ccw(c3849.64,3234.99) 3892.32,3277.66 ccw(c3935,3320.34) K1.35@3935,3259.99 ; K1.35@3920,3234.99 ccw(c3883.78,3234.99) 3909.39,3260.59 ccw(c3935,3286.2) K1.35@3935,3249.99
PTE5: K1.39 U1.2 | length 2863.2
  Top Layer w10: v1(2710,4006) 2892,4006 2908,3990 2908,3952 2894,3938 v1(2894,3811) ; v1(3365,3864) 3374.59,3873.59 3581,3873.59 3590.59,3864 v1(3665,3864) ; K1.39@4135,3234.99 4170,3234.99 ; K1.39@4153,3224.98 cw(c4170,3215.53) 4170,3234.99 ; K1.39@4153,3244.99 ccw(c4170,3254.44) 4170,3234.99 ; v1(4274,3481) 4374,3381 4374,3200 4362,3188 4196,3188 4170,3214 4170,3234.99
  Bottom Layer w10: U1.2@2705.18,3926.19 ccw(c2693.56,3937.82) 2710,3937.82 ccw(c2726.44,3937.82) U1.2@2714.82,3926.19 ; U1.2@2710,3887.91 v1(2710,4006) ; v1(2894,3811) 2942,3763 3176,3763 3277,3864 v1(3365,3864) ; v1(3665,3864) 3665,3724 3760,3629 3952,3629 4100,3481 v1(4274,3481)
PTE6: K1.40 U1.4 | length 1774.7
  Bottom Layer w10: U1.4@2805.18,3849.63 cw(c2795.97,3840.42) 2809,3840.42 ; 2809,3835.59 cw(c2828.86,3835.59) U1.4@2814.82,3849.63 ; U1.4@2810,3887.91 2810,3854 2809,3853 2809,3720 2850,3679 3033,3679 3093,3619 3308.8,3619 3367.8,3678 3593,3678 3684,3587 3842,3587 4094.01,3334.99 ; K1.40@4112.77,3323.55 ccw(c4094.02,3313.89) 4094.02,3334.99 ; K1.40@4112.77,3346.43 cw(c4094.02,3356.08) 4094.02,3334.99 ; K1.40@4135,3334.99 4094.01,3334.99
PTE7: K1.42 U1.6 | length 2376.5
  Top Layer w10: 4219,3382.91 ccw(c4275.05,3382.91) K1.42@4235.42,3343.28 ; 4219,3407.05 ccw(c4299.19,3407.05) K1.42@4242.49,3350.35 ; 4219,3431.19 ccw(c4323.33,3431.19) K1.42@4249.56,3357.42 ; v1(4219,3939) 4219,3359 4235,3343 K1.42@4235,3334.99
  Bottom Layer w10: U1.6@2905.41,3849.42 cw(c2895.88,3839) 2910,3839 ; U1.6@2906.81,3854.45 ccw(c2936.41,3854.45) 2915.48,3833.52 ; U1.6@2910,3887.91 2910,3839 ; U1.6@2914.59,3849.42 ccw(c2924.12,3839) 2910,3839 ; U1.6@2916.81,3854.45 ccw(c2970.55,3854.45) 2932.55,3816.45 ; v1(4219,3939) 4170,3988 4016,3988 3920,3892 3269,3892 3158,3781 2968,3781 2910,3839
PTE8: blue1.4 K1.41 | length 2841.9
  Bottom Layer w10: blue1.4@2410,4095.47 cw(c2410,4036.26) 2451.87,4078.13 cw(c2493.74,4120) blue1.4@2434.53,4120 ; blue1.4@2410,4105.47 cw(c2410,4070.4) 2434.8,4095.2 cw(c2459.6,4120) blue1.4@2424.53,4120 ; blue1.4@2410,4120 2523,4007 2523,3732 2517,3726 2460,3726 2447,3713 2447,3652 2685,3652 2687,3654 2995,3654 3051,3598 3239,3598 3245,3592 3518,3592 3558,3552 3788,3552 4055,3285 4184.98,3285 K1.41@4235,3234.99 ; K1.41@4210,3234.99 ccw(c4149.64,3234.99) 4192.32,3277.66 ccw(c4235,3320.34) K1.41@4235,3259.99 ; K1.41@4220,3234.99 ccw(c4183.78,3234.99) 4209.39,3260.59 ccw(c4235,3286.2) K1.41@4235,3249.99
PTE9: blue1.3 K1.43 | length 4166.3
  Top Layer w10: v1(2372,3777) 2418.5,3730.5 2418.5,3318.5 2556,3181 3376,3181 3598.01,3403.01 3724.01,3403.01 4005,3684 4005,3803 4097,3895 4179,3895 4188,3886 4188,3317 4220,3285 4320,3285 ; K1.43@4320.22,3257.19 ccw(c4305.99,3270.99) 4320,3285 ; 4327.18,3277.82 cw(c4313.28,3263.92) K1.43@4327.39,3250.23 ; K1.43@4329.45,3262.69 ccw(c4327.41,3270) 4335,3270 ; 4334.36,3270.64 cw(c4320.57,3256.85) K1.43@4334.57,3243.27 ; K1.43@4335,3234.99 4335,3270 ; K1.43@4340.55,3262.69 cw(c4342.59,3270) 4335,3270 ; 4320,3285 4335,3270
  Bottom Layer w10: v1(2372,3777) 2367,3782 2367,4177 blue1.3@2410,4220 ; blue1.3@2385.47,4220 cw(c2326.26,4220) 2368.13,4178.13 cw(c2410,4136.26) blue1.3@2410,4195.47 ; blue1.3@2395.47,4220 cw(c2360.4,4220) 2385.2,4195.2 cw(c2410,4170.4) blue1.3@2410,4205.47
PTE10: K1.45 U1.8 | length 2242.5
  Top Layer w10: v1(3132,3810.05) 3132,3398 v1(3287,3243)
  Bottom Layer w10: U1.8@3005.41,3849.42 cw(c2995.88,3839) 3010,3839 ; U1.8@3006.81,3854.45 ccw(c3036.41,3854.45) 3015.48,3833.52 ; U1.8@3010,3887.91 3010,3839 ; U1.8@3014.59,3849.42 ccw(c3024.12,3839) 3010,3839 ; U1.8@3016.81,3854.45 ccw(c3070.55,3854.45) 3032.55,3816.45 ; v1(3132,3810.05) 3038.95,3810.05 3010,3839 ; v1(3287,3243) 3339,3191 4391.01,3191 K1.45@4435,3234.99 ; K1.45@4410,3234.99 cw(c4349.64,3234.99) 4392.32,3192.31 cw(c4435,3149.63) K1.45@4435,3209.99 ; K1.45@4420,3234.99 cw(c4383.79,3234.99) 4409.39,3209.38 cw(c4435,3183.77) K1.45@4435,3219.99
PTE24: CSB.4 K1.63 | length 1963.4
  Top Layer w10: K1.63@4935,3734.99 5025.01,3734.99 5187,3573 5187,3502 5408,3502 5422,3516 5422,3583 5542,3703 5542,4018.54 5538.54,4022 5452,4022 5452,4119 5573,4240 5573,4368 CSB.4@5620,4415 ; K1.63@4957.43,3720.43 cw(c4992.58,3685.28) 4992.58,3734.99 cw(c4992.58,3784.7) K1.63@4957.43,3749.55 ; CSB.4@5595.47,4415 cw(c5536.26,4415) 5578.13,4373.13 cw(c5620,4331.26) CSB.4@5620,4390.47 ; CSB.4@5605.47,4415 cw(c5570.4,4415) 5595.2,4390.2 cw(c5620,4365.4) CSB.4@5620,4400.47
PTE25: CSB.7 K1.64 | length 1556.2
  Top Layer w10: K1.64@4808.41,3726.39 ccw(c4795.02,3720.24) 4795.02,3734.99 ; K1.64@4808.41,3743.58 cw(c4795.02,3749.73) 4795.02,3734.99 ; K1.64@4835,3734.99 4795.01,3734.99 ; CSB.7@5395.47,4314 ccw(c5336.26,4314) 5378.13,4355.87 ccw(c5420,4397.74) CSB.7@5420,4338.53 ; CSB.7@5405.47,4314 ccw(c5370.4,4314) 5395.2,4338.8 ccw(c5420,4363.6) CSB.7@5420,4328.53 ; CSB.7@5420,4314 5372.59,4361.41 5241.41,4361.41 5224,4344 5224,3949 5200,3925 5047,3925 4998,3974 4799,3974 4770,3945 4770,3760 4795.01,3734.99
PTE26: *.2 K1.65 | length 745.3
  Top Layer w10: K1.65@4935,3834.99 5077.01,3834.99 5202,3710 5202,3680 5225,3657 5302,3657 *.2@5345,3700 ; K1.65@4957.43,3820.43 cw(c4992.58,3785.28) 4992.58,3834.99 cw(c4992.58,3884.7) K1.65@4957.43,3849.55 ; *.2@5320.47,3700 cw(c5261.26,3700) 5303.13,3658.13 cw(c5345,3616.26) *.2@5345,3675.47 ; *.2@5330.47,3700 cw(c5295.4,3700) 5320.2,3675.2 cw(c5345,3650.4) *.2@5345,3685.47
PTE27: *.1 K1.66 | length 965.7
  Bottom Layer w10: K1.66@4835,3809.99 cw(c4835,3749.63) 4877.68,3792.31 cw(c4920.36,3834.99) K1.66@4860,3834.99 ; K1.66@4835,3819.99 cw(c4835,3783.77) 4860.61,3809.38 cw(c4886.21,3834.99) K1.66@4850,3834.99 ; K1.66@4835,3834.99 4884.99,3785 5360,3785 *.1@5445,3700 ; *.1@5420.47,3700 ccw(c5361.26,3700) 5403.13,3741.87 ccw(c5445,3783.74) *.1@5445,3724.53 ; *.1@5430.47,3700 ccw(c5395.4,3700) 5420.2,3724.8 ccw(c5445,3749.6) *.1@5445,3714.53
PTE28: *.3 K1.67 | length 485.4
  Top Layer w10: K1.67@4935,3934.99 5010.01,3934.99 *.3@5245,3700 ; K1.67@4957.43,3920.43 cw(c4992.58,3885.28) 4992.58,3934.99 cw(c4992.58,3984.7) K1.67@4957.43,3949.55
pads on no net: *5.5 BMQ1.5 BMQ1.6 BMQ2.5 BMQ2.6 K1.44 K1.106 S1. YH.12 YH.13 YH.14 YH.16 YH.18 YH.19
copper on no net:
  other v1: 5350,3850 4745,4620

## Keep-outs
Keep-Out Layer:
  lines w15: 2069.72,4825 cw(c2115,4825) 2120,4870 ; 2070,3210 2070,4820 ; 2075,3210 ccw(c2120,3205) 2120,3159.72 ; 2105,3160 6380,3160 ccw(c6385,3205) 6430.28,3205 ; 2110,4870 6385,4870 cw(c6385,4824.72) 6430,4819.72 ; 6430,3205 6430,4820

## Other copper
Top Layer:
  text "hebut" at 2280,3975 h60
  text "2018" at 2275,3915 h60
  text "Beacon队" at 2275,3845 h60
  text "田建松" at 2205,3640 h60 r90
  text "孙德桓" at 2130,3630 h60 r90
  text "王浩远" at 2090,3560 h60

## Silkscreen, mask and mechanical layers (free items; w line width, h text height)
Top Overlay:
  text "3V3" at 6185,4670 h30 r270
  text "GND" at 5125,4620 h30 r90
  text "C7" at 2775,4454 h30
  text "B10_RX" at 2136,4449 h30
  text "5V" at 2310,4410 h30
  text "C5" at 2774.85,4352.67 h30
  text "GND" at 2285,4310 h30
  text "5V" at 2705,4290 h30
  text "C4" at 2775.06,4251.33 h30
  text "B11_TX" at 2116,4231 h30 r90
  text "GND" at 2695,4185 h30
  text "C3" at 2775,4150 h30
  text "-" at 4660,4145 h30
  text "GND" at 2120,4140 h30 r90
  text "5V" at 5335,4085 h30 r270
  text "5V" at 5665,4080 h30 r270
  text "GND" at 4025,4070 h30 r270
  text "GND" at 5095,4040 h30 r90
  text "GND" at 2120,4035 h30 r90
  text "+" at 4660,4035 h30
  text "GND" at 5425,4035 h30 r90
  text "5V" at 4025,3975 h30 r270
  text "3V3" at 2120,3950 h30 r90
  text "D11" at 4030,3870 h30 r270
  text "5V" at 2120,3850 h30 r90
  text "5V" at 6260,3805 h30 r90
  text "D12" at 4030,3760 h30 r270
  text "D13" at 4025,3665 h30 r270
  text "GND" at 6300,3635 h30
  text "E26" at 5325,3620 h30
  text "E27" at 5425,3620 h30
  text "A5" at 5130,3615 h30
  text "E28" at 5225,3615 h30
  text "D14" at 4025,3570 h30 r270
  text "15V" at 2995,3325 h30
  text "GND" at 3180,3285 h30 r270
  text "5V" at 2440,3260 h30
Bottom Overlay:
  text "(R1/R2+1)*1.25" at 6200,4130 h30

## Text inside footprints (layer, text, board x,y; h text height)
220UF: Top Overlay "+" at 4375,4490 h30 r270
470UF: Top Overlay "+" at 6210,4115 h30 r180
470UF: Top Overlay "+" at 4015,4445 h30 r270
*5: Top Overlay "PTC8" at 2285,4730 h30; Top Overlay "PTC18" at 2265,4630 h30; Top Overlay "3V3" at 3250,4625 h30; Top Overlay "PTC15" at 3245,4725 h30
bell1: Top Overlay "+" at 3630,3860 h30
BMQ1: Top Overlay "6" at 5250,3810 h30 r270; Top Overlay "5" at 5150,3810 h30 r270; Top Overlay "2" at 5250,4150 h30 r270; Top Overlay "1" at 5150,4140 h30 r270
BMQ2: Top Overlay "6" at 5575,3805 h30 r270; Top Overlay "5" at 5475,3805 h30 r270; Top Overlay "2" at 5575,4145 h30 r270; Top Overlay "1" at 5475,4135 h30 r270
YH: Top Overlay "1" at 6189,4741 h30